# Altium PCB M2_ZED-F9T_MODULE.PcbDoc
Units mil, origin at the board's own origin, x right, y up, seen from the top; angles counter-clockwise.
Board outline 866.14 x 1653.54 mil, 4 copper layers (L01-Top Layer, L02-Inner Layer, L03-Inner Layer, L04-Bottom Layer), stack 29.566 mil thick; 36 components, 30 nets, 248 pads, 183 vias.
Unrouted connection lines stored in the file: 2.
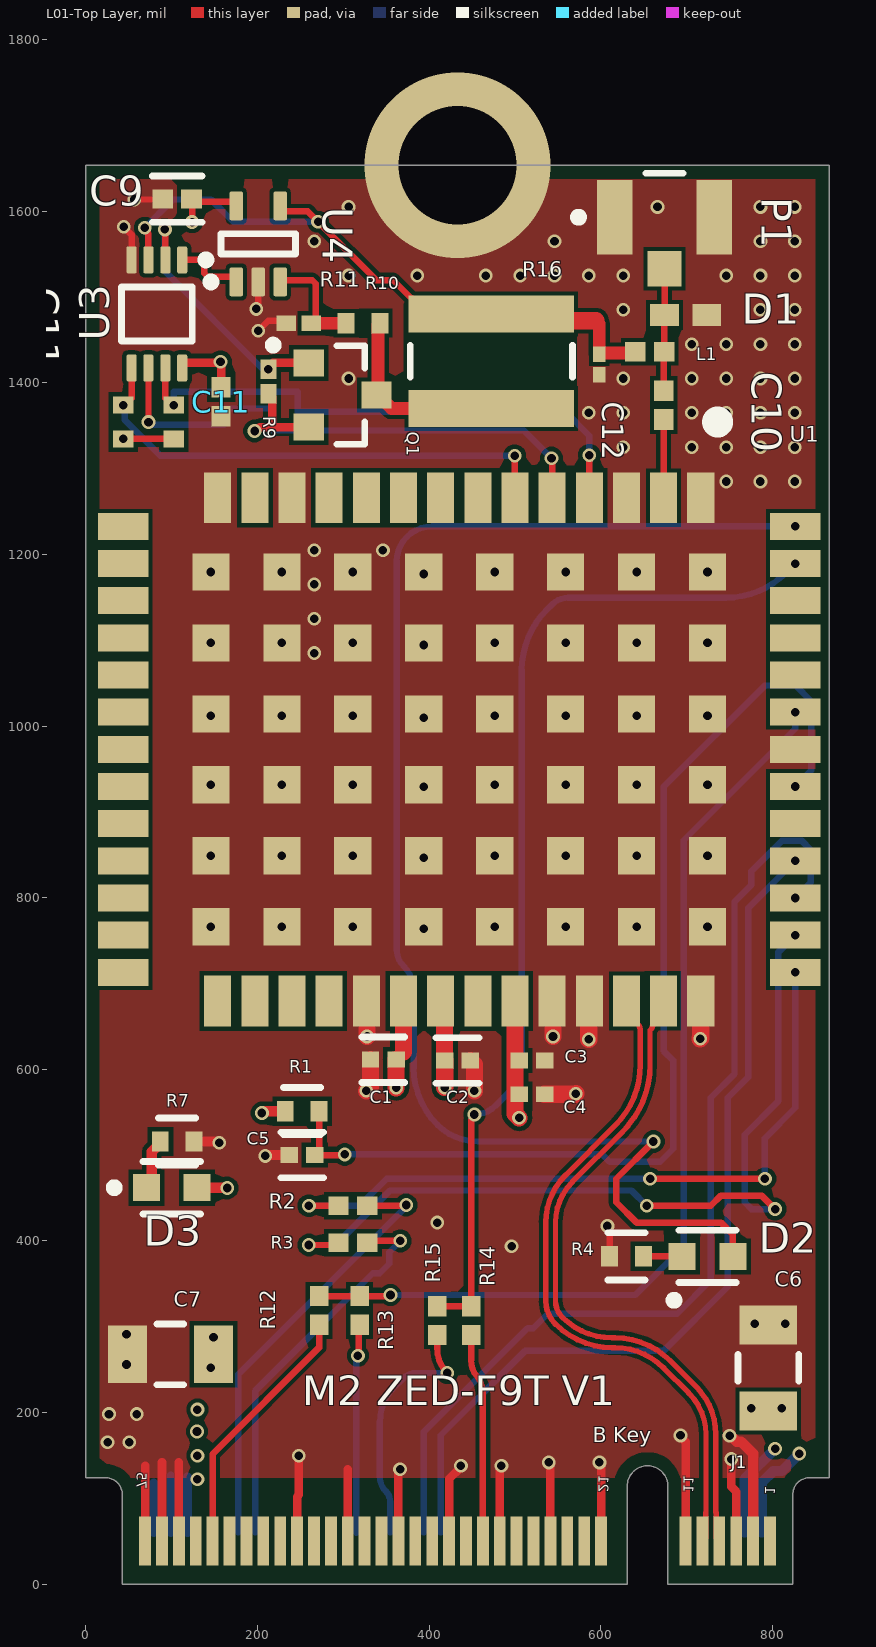
[diagram p0: L01-Top Layer view]
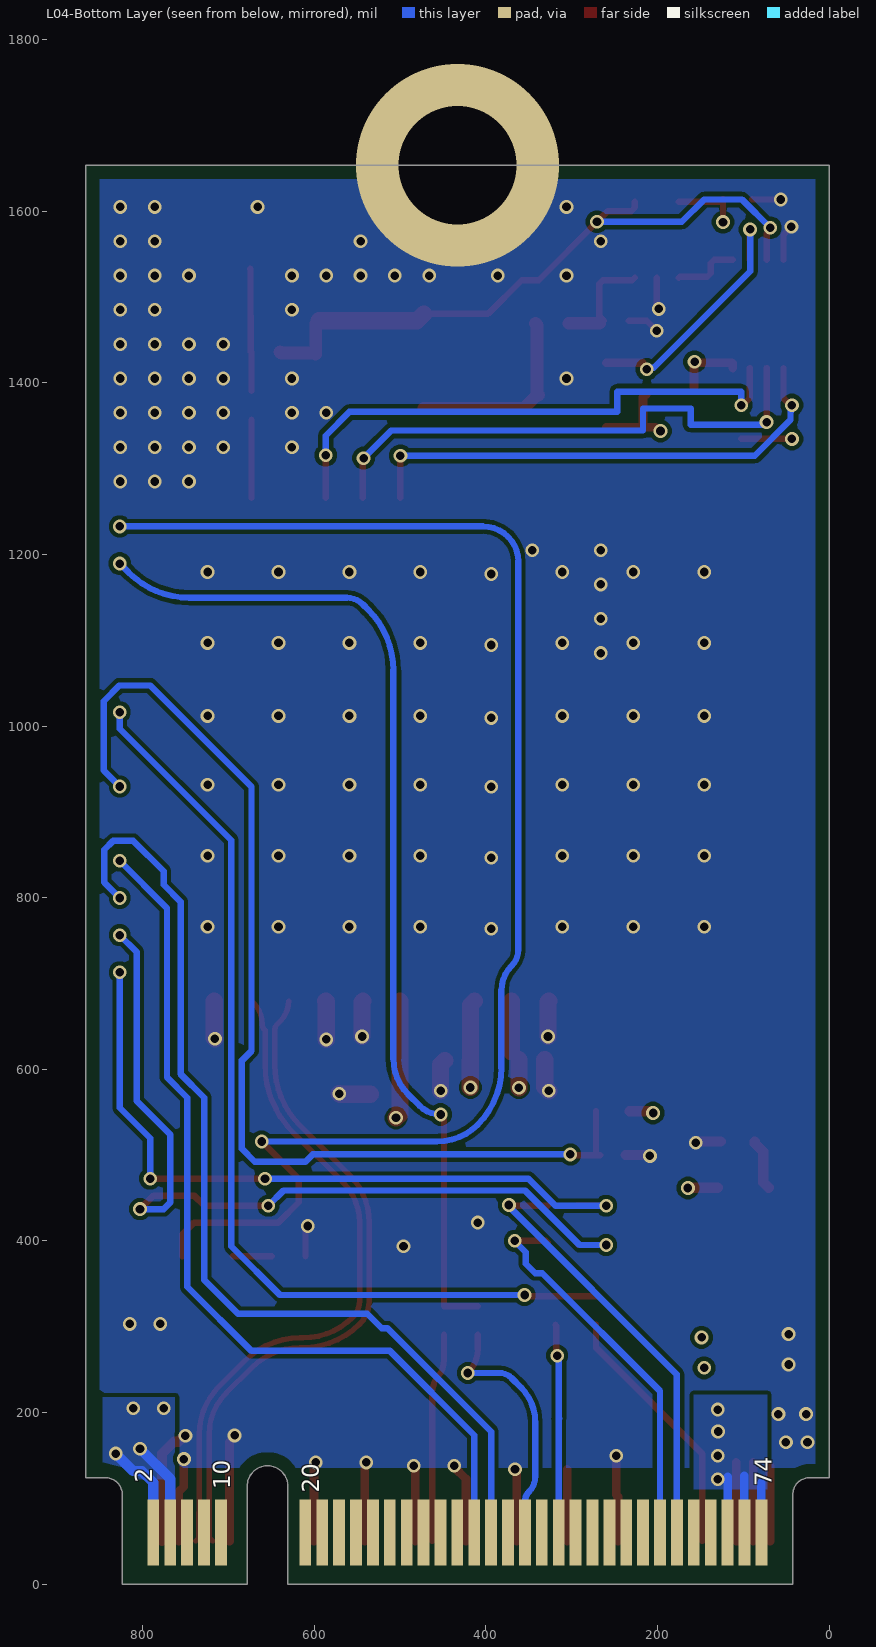
[diagram p1: L04-Bottom Layer view, seen from below]
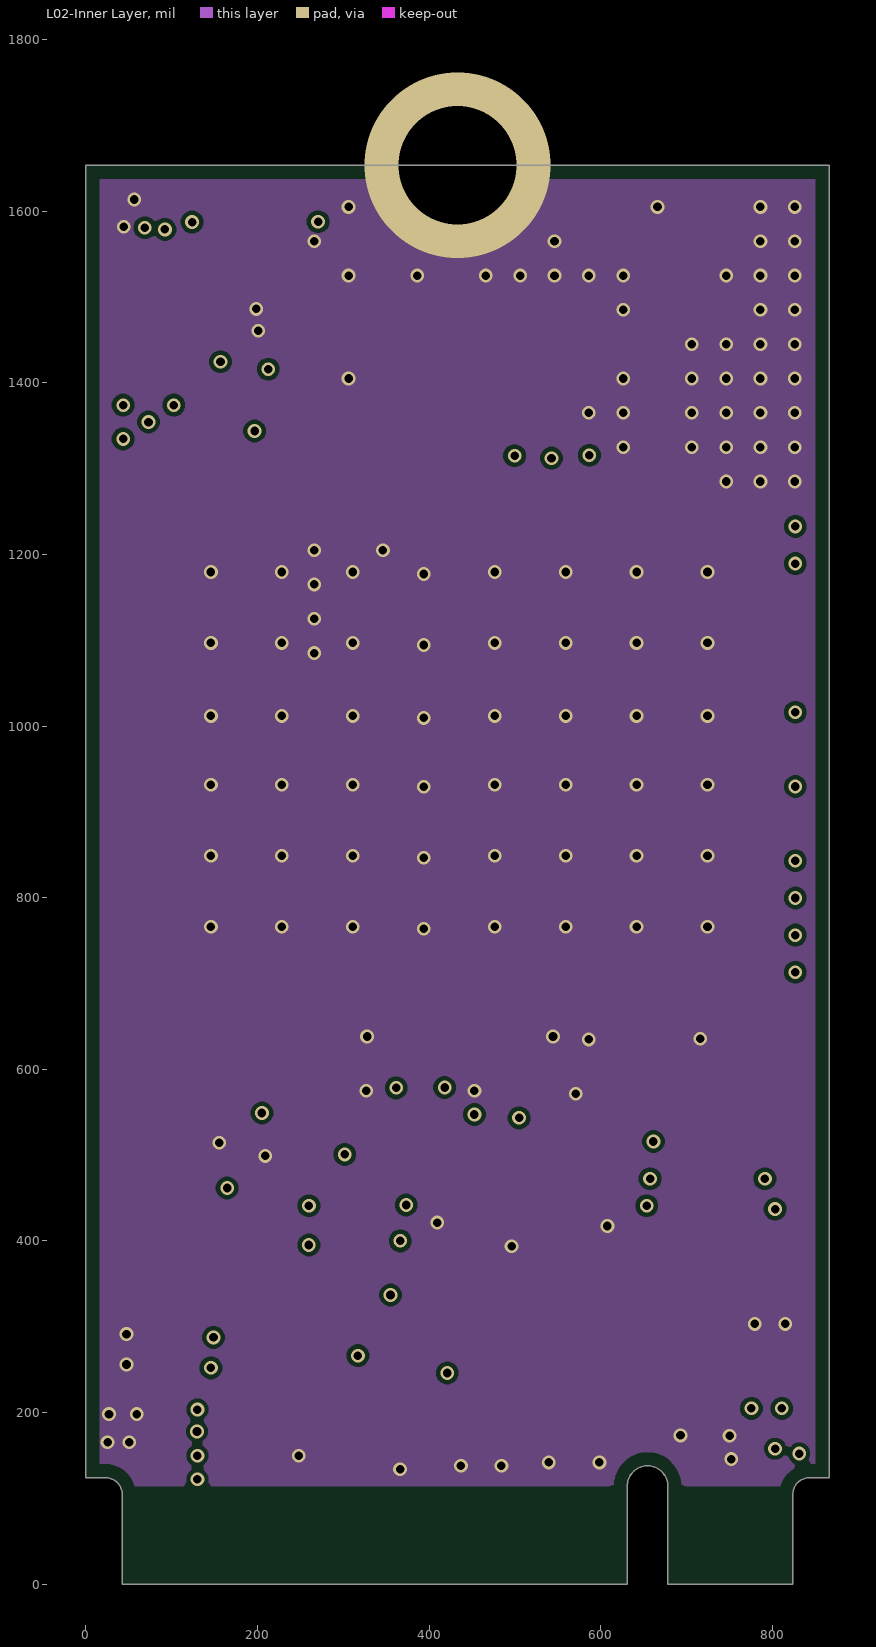
[diagram p2: L02-Inner Layer]
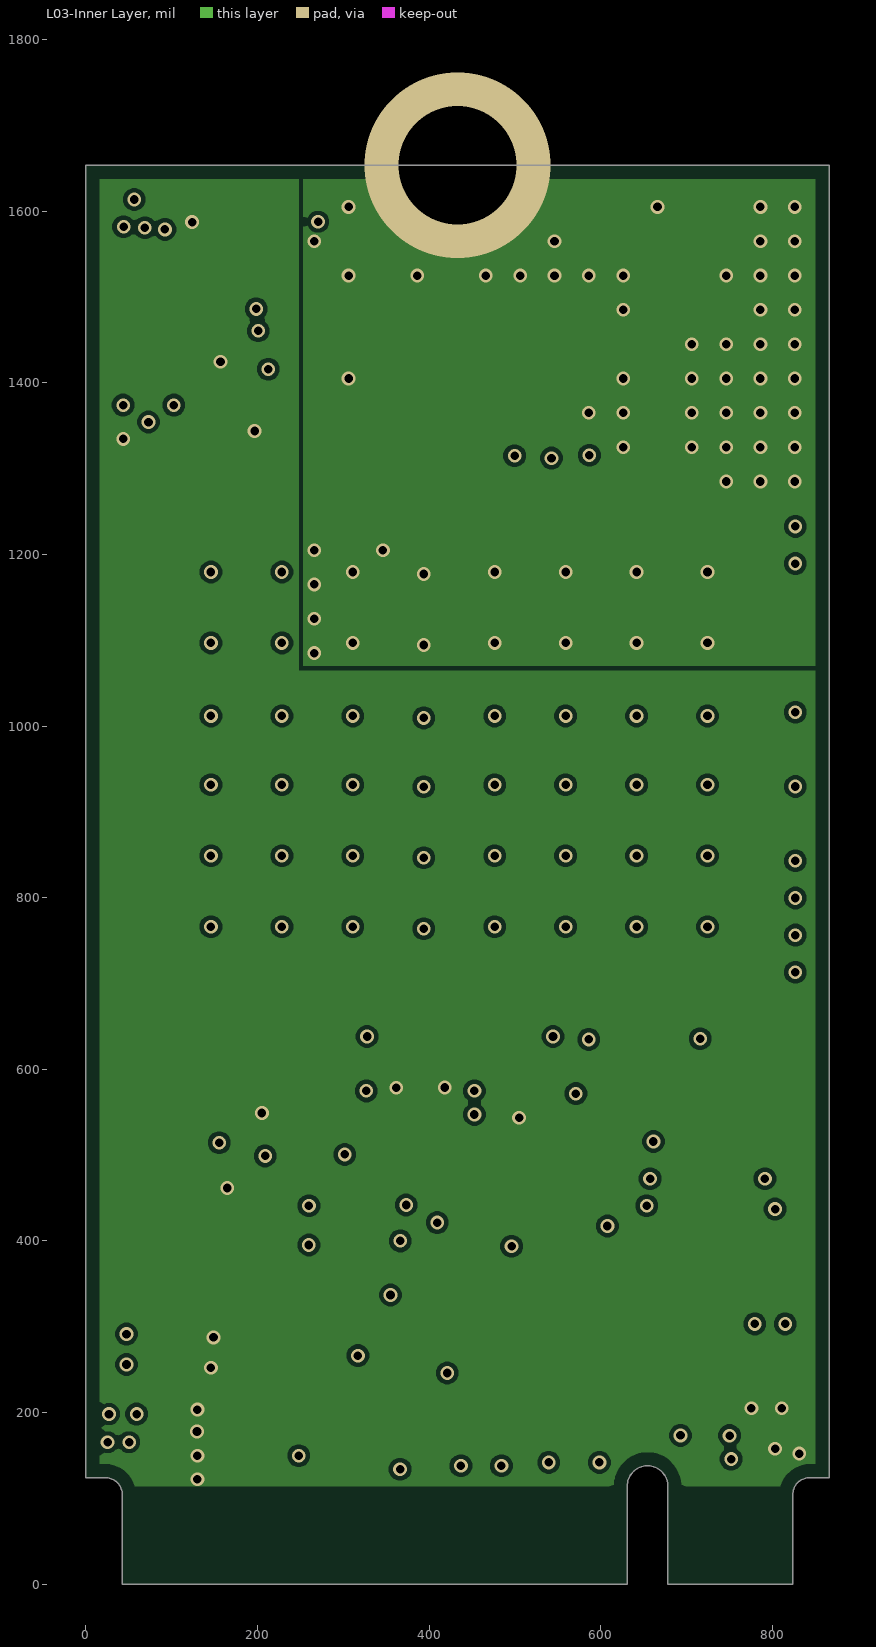
[diagram p3: L03-Inner Layer]
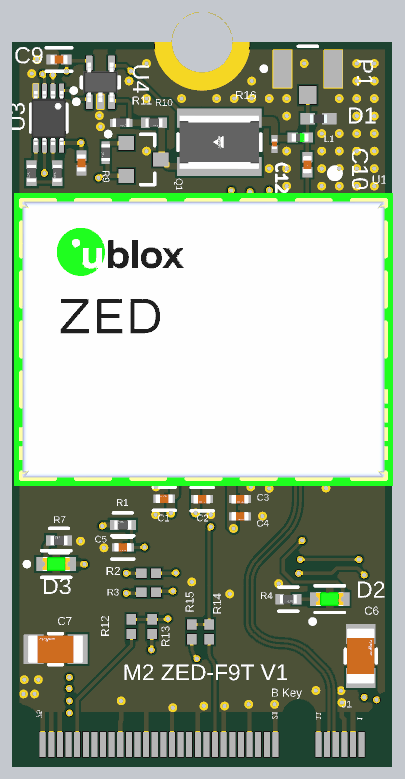
[diagram p4: 3D render of the assembled board from above, using the file's embedded part models]

## Layer stack, top to bottom
Top Solder: solder mask 0.6, Solder Resist, Dk 3.9
L01-Top Layer: signal copper 1.378
Dielectric 1: prepreg 4.331, 2116, Dk 3.7
L02-Inner Layer: signal copper 1.2
Dielectric 2: core 15.748, FR4, Dk 4.04
L03-Inner Layer: signal copper 1.2
Dielectric 3: prepreg 4.331, 2116, Dk 3.7
L04-Bottom Layer: signal copper 1.378
Bottom Solder: solder mask 0.6, Solder Resist, Dk 3.9

## Board outline
42.32,0 42.32,104.33 ccw(c22.64,104.33) 22.64,124.02 0,124.02 0,1653.54 866.14,1653.54 866.14,124.02 843.5,124.02 ccw(c843.5,104.33) 823.82,104.33 823.82,0 678.15,0 678.15,114.17 ccw(c654.53,114.17) 630.91,114.17 630.91,0

## Design rules (kind name [scope] priority, off if disabled: settings)
AcuteAngle [All] p1: minimum=6.00000000000000E+0001 checktracksonly=FALSE
BoardOutlineClearance [All] p1: gap=15.75 ignorepadtopadclearanceinfootprint=FALSE
Clearance Clearance_L1andL4_Copper [(InPolygon AND (OnLayer('Top Layer') OR OnLayer('Bottom Layer'))) vs (InDifferentialPairClass('All Differential Pairs'))] p1: gap=5 ignorepadtopadclearanceinfootprint=FALSE
Clearance [All] p2: gap=5 ignorepadtopadclearanceinfootprint=FALSE
ComponentClearance [All] p1: gap=15.75 collisioncheckmode=3 verticalgap=19.68 showdistances=FALSE
DiffPairsRouting 90_Ohm_L1andL4 [InDifferentialPairClass('USB')] p1: maxlimit=7 minlimit=5 mostfreqgap=7 toplayer_maxgap=5 toplayer_prefgap=5 toplayer_minwidth=6.33 toplayer_maxwidth=6.33 toplayer_prefwidth=6.33 bottomlayer_maxgap=5 bottomlayer_prefgap=5 bottomlayer_minwidth=6.33 bottomlayer_maxwidth=6.33 bottomlayer_prefwidth=6.33 impedanceprofiledriven=TRUE impedanceprofileid={6D9B781E-2234-44CB-9805-C73247B854E7} impedanceprofilevalue=90.000000 maxuncoupledlength=200
DiffPairsRouting 100_Ohm_L1andL4 [InDifferentialPairClass('100_Ohm')] p2: maxlimit=7 minlimit=7 mostfreqgap=7 toplayer_minwidth=8 toplayer_maxwidth=8 toplayer_prefwidth=8 midlayer1_minwidth=8 midlayer1_maxwidth=8 midlayer1_prefwidth=8 midlayer2_minwidth=8 midlayer2_maxwidth=8 midlayer2_prefwidth=8 bottomlayer_minwidth=8 bottomlayer_maxwidth=8 bottomlayer_prefwidth=8 maxuncoupledlength=200
DiffPairsRouting 100_Ohm_Default [All] p3: maxlimit=10 minlimit=9.5 mostfreqgap=10 toplayer_maxgap=9.5 toplayer_prefgap=9.5 toplayer_minwidth=4.5 toplayer_maxwidth=4.5 toplayer_prefwidth=4.5 midlayer1_mingap=10 midlayer1_minwidth=15 midlayer1_maxwidth=15 midlayer1_prefwidth=15 midlayer2_mingap=10 midlayer2_minwidth=15 midlayer2_maxwidth=15 midlayer2_prefwidth=15 bottomlayer_maxgap=9.5 bottomlayer_prefgap=9.5 bottomlayer_minwidth=4.5 bottomlayer_maxwidth=4.5 bottomlayer_prefwidth=4.5 maxuncoupledlength=200
HoleSize [All] p1: absolutevalues=TRUE maxlimit=118.11 minlimit=5.91 maxpercent=80.000 minpercent=20.000
HoleToHoleClearance [All] p1: gap=11.81 allowstackedmicrovias=TRUE
MatchedLengths [InDifferentialPairClass('All Differential Pairs')] p1: tolerance=10 checknetsindiffpair=TRUE checkdiffpairvsdiffpair=FALSE checkxsignals=FALSE checkothers=FALSE
MinimumSolderMaskSliver [All] p1: minsoldermaskwidth=3.94 // 0.076mm for Green Soldermask, 0.1 for other color soldermask
PlaneClearance [All] p1: clearance=10
PolygonConnect [All] p1: connectstyle=Direct reliefconductorwidth=20 reliefentries=4 polygonreliefangle="90 Angle" airgapwidth=10
RoutingCorners [All] p1: cornerstyle=45-Degree minsetback=98.43 maxsetback=98.43
RoutingVias [All] p1: holewidth=10 width=16 viastyle="Through Hole" minholewidth=10 minwidth=16 maxholewidth=11.81 maxwidth=23.62
SilkToSilkClearance [All] p1: silktosilkclearance=3.94
SilkToSolderMaskClearance [IsPad] p1: minsilkscreentomaskgap=5 clearancetoexposedcopper=TRUE
SolderMaskExpansion [All] p1: expansion=1.97 istentingtop=FALSE
UnRoutedNet [All] p1: checkbadconnections=TRUE
Width [All] p1: maxlimit=100 minlimit=5 preferedwidth=7.5 toplayer_maxwidth=40 bottomlayer_maxwidth=40 minimp=50.000000 maximp=50.000000 favimp=50.000000
20 further rules are at their usual default settings.

## Classes and differential pairs
differential pair class USB: USB_D
net class RF: RF_ANT RF_IN
component class 02-Antenna_Supervisor: C9 C10 C11 C12 D1 L1 P1 Q1 R9 R10 R11 R16 R17 R18 U3 U4
component class 03-M2_GoldFingers: C6 C7 J1 R12 R13 R14 R15
component class 01-M2_ZED-F9T_MODULE: C1 C2 C3 C4 C5 D2 D3 R1 R2 R3 R4 R7 U1
differential pair USB_D: +USB_D_P -USB_D_N

## Components (designator, comment, footprint, x,y, rotation, side; value= is the part's Value field where it differs from the comment)
C1 "1uF_25V_0402" FP-CL542-IPC_C 346.55,611.13 r180 top
C2 "1uF_25V_0402" FP-CL542-IPC_C 433.07,610.24 r0 top
C3 "1uF_25V_0402" FP-CL542-IPC_C 519.68,610.24 r0 top
C4 "1uF_25V_0402" FP-CL542-IPC_C 519.68,570.87 r0 top
C5 "1uF_25V_0402" FP-CL542-IPC_C 251.97,500 r0 top
C6 "47uF_6.3V_1206" FP-GRM31C-0_2-e0_3_0_8-IPC_C 795.28,251.97 r90 top
C7 "47uF_6.3V_1206" FP-GRM31C-0_2-e0_3_0_8-IPC_C 98.43,267.72 r180 top
C9 "100nF" FP-0402-L_1_0_0_05-W_0_5-IPC_B 106.3,1614.17 r180 top
C10 "100nF" FP-0402-L_1_0_0_05-W_0_5-IPC_B 673.23,1374.02 r90 top
C11 "100nF" FP-0402-L_1_0_0_05-W_0_5-IPC_B 157.48,1377.95 r270 top
C12 "10nF" FP-GRM033-0_03-IPC_B 598.27,1421.32 r270 top
D1 "PESD0402-140" FP-PESD0402-MFG 699,1478.89 r180 top value=0.25pF
D2 "LTST-C191KGKT" FP-LTST-C191KGKT-MFG 724.41,381.89 r0 top
D3 "LTST-C191KGKT" FP-LTST-C191KGKT-MFG 99.92,461.92 r0 top
J1 "OCPTAP_M2_FINGERS" "OCPTAP M2 FINGERS" 797.24,50.2 r0 top locked
L1 "47nH 300mA" FP-LQG15HH_02-IPC_B 657,1436.14 r0 top
P1 "U.FL-R-SMT-1(01)" HRS-U.FL-R-SMT-3_V 674.42,1593.01 r0 top
Q1 "NTR2101PT1G" ONSC-SOT-23-3-318-08_V 299.21,1385.83 r0 top
R1 "1k" FP-RMCF0402-MFG 251.97,551.18 r180 top
R2 "0_5%_0402" RESC1005X40X25NL05T10 311.02,440.94 r180 top
R3 "0_5%_0402" RESC1005X40X25NL05T10 311.02,397.64 r180 top
R4 "1k" FP-RMCF0402-MFG 629.92,381.89 r0 top
R7 "1k" FP-RMCF0402-MFG 106.3,515.75 r180 top
R9 "100k" FP-RMCF0402-IPC_C 212.6,1401.57 r270 top
R10 "1k" FP-RMCF0402-MFG 322.83,1469.49 r0 top
R11 "100k" FP-RMCF0402-IPC_C 248.03,1469.44 r0 top
R12 "0_5%_0402" RESC1005X40X25NL05T10 271.65,318.9 r270 top
R13 "0_5%_0402" RESC1005X40X25NL05T10 318.9,318.9 r270 top
R14 "DNI_0_5%_0402" RESC1005X40X25NL05T10 448.82,307.09 r90 top
R15 "0_5%_0402" RESC1005X40X25NL05T10 409.45,307.09 r90 top
R16 "22_1%_1218 1.5W" FP-CRCW1218-HPe3-MFG 472.44,1425.2 r270 top
R17 "1k" FP-RMCF0402-MFG 102.36,1354.33 r270 top
R18 "1k" FP-RMCF0402-MFG 43.31,1354.33 r270 top
U1 "ZED-F9T-00B" GPS_ZED-F9T 716.54,1266.14 r180 top locked
U3 "SN74LVC3G07DCUR" DCU0008A_N 82.68,1480.32 r270 top
U4 "LPV511MGX/NOPB" DCK0005A_N 200.79,1561.93 r90 top

## Footprints (in the part's own frame and the unit in brackets; to place one, negate y for a bottom-side part, rotate by r counter-clockwise, add the part's x,y. Pads: shape width x height; smd on the part's side, far side on the other; paste and mask are expansions set on the pad)
DCK0005A_N [mm] "SOT23, 5-Leads, Body 2.15x1.4mm, Pitch 0.65mm, IPC Medium Density"
  rrect25% 0.85x0.4 smd: 1(-1.125,0.65) 2(-1.125,0) 3(-1.125,-0.65) 4(1.125,-0.65) 5(1.125,0.65)
  silkscreen extent -1.25,-1.1 0.3,1.52, body extent -1.14,-1 1.14,1, height 0.94
DCU0008A_N [mm] "SOP, 8-Leads, Body 2.4x2.1mm, Pitch 0.5mm, IPC Medium Density"
  rrect33% 0.8x0.3 smd: 1(-1.6,0.75) 2(-1.6,0.25) 3(-1.6,-0.25) 4(-1.6,-0.75) 5(1.6,-0.75) 6(1.6,-0.25) 7(1.6,0.25) 8(1.6,0.75)
  silkscreen extent -1.72,-1.05 0.8,1.58, body extent -1.56,-1 1.56,1, height 0.9
FP-0402-L_1_0_0_05-W_0_5-IPC_B [mil]
  rect 24.23x22.54 smd paste+0 mask+0: 1(-16.87,0) 2(16.87,0)
  silkscreen extent -29,-27 29,27, body extent -35,-17 35,17, height 10
FP-CL542-IPC_C [mil]
  rect 20.29x18.6 smd paste+0 mask+0: 1(-14.9,0) 2(14.9,0)
  silkscreen extent -25,-27 25,27, body extent -29,-15 29,15, height 10
FP-CRCW1218-HPe3-MFG [mm]
  rect 1.1x4.9 smd paste+0 mask+0: 1(-1.4,0) 2(1.4,0)
  silkscreen extent -0.48,-2.4 0.48,2.4, body extent -2.05,-2.55 2.05,2.55, height 0.25
FP-GRM31C-0_2-e0_3_0_8-IPC_C [mil]
  rect 45.46x67.17 smd paste+0 mask+0: 1(-50.23,0) 2(50.23,0)
  silkscreen extent -16,-35 16,35, body extent -77,-39 77,39, height 10
FP-GRM033-0_03-IPC_B [mil]
  rect 17.88x14.28 smd paste+0 mask+0: 1(-11.98,0) 2(11.98,0)
  body extent -27,-13 27,13, height 10
FP-LQG15HH_02-IPC_B [mil]
  rect 24.23x22.54 smd paste+0 mask+0: 1(-16.87,0) 2(16.87,0)
  body extent -35,-17 35,17, height 10
FP-LTST-C191KGKT-MFG [mm]
  rect 0.8x0.8 smd paste+0 mask+0: 1(-0.75,0) 2(0.75,0)
  silkscreen extent -1.12,-1.42 0.85,0.77, body extent -1.25,-0.55 1.25,0.55, height 0.25
FP-PESD0402-MFG [mm]
  rect 0.85x0.65 smd paste+0 mask+0: 1(-0.625,0) 2(0.625,0)
  body extent -1.15,-0.43 1.15,0.43, height 0.25
FP-RMCF0402-IPC_C [mil]
  rect 22.88x18.6 smd paste+0 mask+0: 1(-14.39,0) 2(14.39,0)
  body extent -30,-15 30,15, height 10
FP-RMCF0402-MFG [mm]
  rect 0.5x0.6 smd paste+0 mask+0: 1(-0.5,0) 2(0.5,0)
  silkscreen extent -0.55,-0.7 0.55,0.7, body extent -0.85,-0.4 0.85,0.4, height 0.25
GPS_ZED-F9T [mm]
  rect 0.8x1.5 smd: 1(0,0) 2(1.1,0) 3(2.2,0) 4(3.3,0) 5(4.4,0) 6(5.5,0) 7(6.6,0) 8(7.7,0) 9(8.8,0) 10(9.9,0) 11(11,0) 12(12.1,0) 13(13.2,0) 14(14.3,0) 28(14.3,14.9) 29(13.2,14.9) 30(12.1,14.9) 31(11,14.9) 32(9.9,14.9) 33(8.8,14.9) 34(7.7,14.9) 35(6.6,14.9) 36(5.5,14.9) 37(4.4,14.9) 38(3.3,14.9) 39(2.2,14.9) 40(1.1,14.9) 41(0,14.9)
  rect 1.5x0.8 smd: 15(17.1,0.85) 16(17.1,1.95) 17(17.1,3.05) 18(17.1,4.15) 19(17.1,5.25) 20(17.1,6.35) 21(17.1,7.45) 22(17.1,8.55) 23(17.1,9.65) 24(17.1,10.75) 25(17.1,11.85) 26(17.1,12.95) 27(17.1,14.05) 42(-2.8,14.05) 43(-2.8,12.95) 44(-2.8,11.85) 45(-2.8,10.75) 46(-2.8,9.65) 47(-2.8,8.55) 48(-2.8,7.45) 49(-2.8,6.35) 50(-2.8,5.25) 51(-2.8,4.15) 52(-2.8,3.05) 53(-2.8,1.95) 54(-2.8,0.85)
  rect 1.1x1.1 smd: 55(-0.2,12.7) 55(-0.2,10.6) 55(-0.2,8.5) 55(-0.2,6.4) 55(-0.2,4.3) 55(-0.2,2.2) 55(1.9,10.6) 55(1.9,12.7) 55(1.9,8.5) 55(1.9,6.4) 55(1.9,2.2) 55(1.9,4.3) 55(4,10.6) 55(4,12.7) 55(4,4.3) 55(4,6.4) 55(4,8.5) 55(4,2.2) 55(6.1,10.6) 55(6.1,12.7) 55(6.1,4.3) 55(6.1,6.4) 55(6.1,8.5) 55(6.1,2.2) 55(8.2,6.4) 55(8.2,8.5) 55(8.2,10.6) 55(8.2,12.7) 55(8.2,2.2) 55(8.2,4.3) 55(10.3,6.4) 55(10.3,8.5) 55(10.3,10.6) 55(10.3,12.7) 55(10.3,2.2) 55(10.3,4.3) 55(12.4,6.4) 55(12.4,8.5) 55(12.4,10.6) 55(12.4,12.7) 55(12.4,2.2) 55(12.4,4.3) 55(14.5,12.7) 55(14.5,2.2) 55(14.5,4.3) 55(14.5,6.4) 55(14.5,8.5) 55(14.5,10.6)
  silkscreen extent -0.58,-2.32 -0.42,-2.16, body extent -3.88,-1.1 18.12,15.9, height 2.49
HRS-U.FL-R-SMT-3_V [mm] "SMT, 3-Leads, Body 2.6x2.6mm"
  rect 1.05x2.2 smd: 1(-1.475,0) 2(1.475,0)
  rect 1x1.05 smd: 3(0,-1.525)
  silkscreen extent -2.67,-0.12 0.55,1.3, body extent -1.3,-1.3 1.3,1.3, height 1.25
"OCPTAP M2 FINGERS" [mm]
  rect 0.35x1.45 smd: 1(0,0) 3(-0.5,0) 5(-1,0) 7(-1.5,0) 9(-2,0) 11(-2.5,0) 21(-5,0) 23(-5.5,0) 25(-6,0) 27(-6.5,0) 29(-7,0) 31(-7.5,0) 33(-8,0) 35(-8.5,0) 37(-9,0) 39(-9.5,0) 41(-10,0) 43(-10.5,0) 45(-11,0) 47(-11.5,0) 49(-12,0) 51(-12.5,0) 53(-13,0) 55(-13.5,0) 57(-14,0) 59(-14.5,0) 61(-15,0) 63(-15.5,0) 65(-16,0) 67(-16.5,0) 69(-17,0) 71(-17.5,0) 73(-18,0) 75(-18.5,0)
  rect 0.35x1.95 smd far side: 2(-0.244,0.25) 4(-0.744,0.25) 6(-1.244,0.25) 8(-1.744,0.25) 10(-2.244,0.25) 20(-4.744,0.25) 22(-5.244,0.25) 24(-5.744,0.25) 26(-6.244,0.25) 28(-6.744,0.25) 30(-7.244,0.25) 32(-7.744,0.25) 34(-8.244,0.25) 36(-8.744,0.25) 38(-9.244,0.25) 40(-9.744,0.25) 42(-10.244,0.25) 44(-10.744,0.25) 46(-11.244,0.25) 48(-11.744,0.25) 50(-12.244,0.25) 52(-12.744,0.25) 54(-13.244,0.25) 56(-13.744,0.25) 58(-14.244,0.25) 60(-14.744,0.25) 62(-15.244,0.25) 64(-15.744,0.25) 66(-16.244,0.25) 68(-16.744,0.25) 70(-17.244,0.25) 72(-17.744,0.25) 74(-18.244,0.25)
ONSC-SOT-23-3-318-08_V [mm] "SOT23, 3-Leads, Body 2.92x1.3mm, Pitch 0.95mm"
  rect 0.9x0.8 smd: 1(-1,0.95) 2(-1,-0.95) 3(1,0)
  silkscreen extent -2.18,-1.46 0.65,1.6, body extent -0.65,-1.46 0.65,1.46, height 1.11
RESC1005X40X25NL05T10 [mm] "Chip Resistor, 2-Leads, Body 1.00x0.50mm, IPC Medium Density"
  rect 0.6x0.55 smd: 1(-0.425,0) 2(0.425,0)
  body extent -0.53,-0.27 0.53,0.28, height 0.4

## Part data
C1 C2 C3 C4 C5: library part CMP-13271-001051-1, "Cap Ceramic 1uF 25V X5R ±10% SMD 0402 +85°C Paper T/R", Capacitance=1uF, Case Code (Imperial)=0402, Case Code (Metric)=1005, Dielectric=X5R, Max Operating Temperature=85°C, Min Operating Temperature=-55°C, Package Quantity=10000, Tolerance=10%, Voltage Rating=25V, Case/Package=0402, Depth=0.5mm, Height=0.5mm, Lead Free="Lead Free", Length=1mm, Material=Ceramic, Mount="Surface Mount", Packaging="Tape and Reel", Radiation Hardening=No, Thickness=0.022inch, Width=0.02inch
C6 C7: library part CMP-2000-06344-2, "Chip Multilayer Ceramic Capacitors for General Purpose, 1206, 47uF, X5R, 15%, 20%, 6.3V", Capacitance=47uF, Case Code (Imperial)=1206, Case Code (Metric)=3216, Dielectric=X5R, Max Operating Temperature=85°C, Min Operating Temperature=-55°C, Package Quantity=2000, Tolerance=20%, Voltage=6.3V, Case/Package=1206, Depth=1.6mm, Height=1.6mm, Lead Free="Lead Free", Length=3.2mm, Material=Ceramic, Mount="Surface Mount", Packaging="Tape and Reel", Radiation Hardening=No, REACH SVHC="No SVHC", Termination=SMD/SMT, Thickness=0.071inch, Voltage Rating=6.3V, Voltage Rating (DC)=6.3V, Width=0.063inch
C9 C10 C11: library part CMP-14477-000330-2, "None", Case Code (Imperial)=0402, Case Code (Metric)=1005, Dielectric=X5R, Max Operating Temperature=85°C, Min Operating Temperature=-55°C, Package Quantity=10000, Tolerance=10%, Voltage Rating=50V, Capacitance=100nF, Case/Package=0402, Halogen Free="Halogen Free", Height=0.5mm, Length=0.039inch, Mount="Surface Mount", Packaging="Tape and Reel", RoHS Compliant=Yes, Termination=SMD/SMT, Thickness=0.022inch, Voltage Rating (DC)=50V, Width=0.02inch
C12: library part CMP-06035-000448-1, "Chip Multilayer Ceramic Capacitors for General Purpose, 0201, 10000pF, X7R, 15%, 10%, 16V", Dielectric=X7R, Tolerance=10%, Voltage Rating (DC)=16V, Capacitance=10nF, Length=600um, Thickness=300um, Width=300um
D1: library part CMP-08607-000011-1, "TVS DIODE 14V 40V 0402", Breakdown Voltage=14V, Capacitance=0.25pF, Clamping Voltage=40V, Manufacturer="Littelfuse Inc.", Package=PESD0402, Temperature="-55°C to +125°C", Temperature Range High=+125°C, Temperature Range Low=-55°C, Automotive=Yes, Automotive Grade="Grade 1", CATEGORY=Diode, ComponentLink2Description=Datasheet, ComponentLink2URL=https://www.littelfuse.com/~/media/electronics/datasheets/polymer_esd_suppressors/littelfuse_polymer_esd_suppressor_pesd_catalog_datasheet.pdf.pdf, Device Class L1="Circuit Protection", Device Class L2="TVS Diodes", Device Class L3=unset, Digikey Description="TVS DIODE 14V 40V 0402", Direction=Bidirectional, Height=0.43mm, Ipc Land Pattern Name=DIOC10050X33, Lead Free=Yes, Manufacturer Part Number=PESD0402-140, Number Of Channels=1, Octopart=https://octopart.com/pesd0402-140-littelfuse-74215061, Reverse Standoff Voltage=14V, RoHS=TRUE
D2 D3: library part CMP-2000-05198-2, "LED GREEN CLEAR SMD", Case Code (Imperial)=0603, Case Code (Metric)=1608, Color=Green, Forward Current=30mA, Forward Voltage=2V, Lens Color=Colorless, Max Operating Temperature=85°C, Max Power Dissipation=75mW, Min Operating Temperature=-55°C, Package Quantity=1, Reverse Voltage=5V, Test Current=20mA, Case/Package=0603, Depth=0.8mm, Dominant Wavelength=571nm, Height=0.55mm, Illumination Color=Green, Lead Free="Lead Free", Length=1.6mm, Lens Style=Rectangular, Lens Transparency=Clear, Luminous Intensity=35mcd, Mount="Surface Mount", Number of Elements=1, Number of LEDs=1, Number of Pins=2, Packaging="Tape and Reel", Power Dissipation=75mW, Power Rating=75mW, Radiation Hardening=No, Viewing Angle=130°, Wavelength=574nm, Width=0.8mm
L1: library part CMP-06042-015783-1, "Multilayer type RF Inductor 47nH ±5% 0.72Ω 300mA 0402", Case Code (Imperial)=0402, Case Code (Metric)=1005, Current Rating=200mA, DC Resistance (DCR)=720mR, Inductance=47nH, Max Operating Temperature=125°C, Min Operating Temperature=-55°C, Package Quantity=1, Self Resonant Frequency=1GHz, Test Frequency=100MHz, Tolerance=5%, Case/Package=0402, Core Material=Air, DC Current=200mA, Depth=0.55mm, Height=0.5mm, Height - Seated (Max)=0.022inch, Lead Free="Lead Free", Length=1mm, Max DC Current=200mA, Military Standard=Not, Mount="Surface Mount", Packaging="Tape and Reel", Q Factor=8, Radiation Hardening=No, Rated Current-Max=200mA, Series=LQG15HS, Shielding=Unshielded, Termination=SMD/SMT, Width=0.02inch
P1: library part CMP-2000-05153-1, "Ultra Small Coaxial Connector, 6 GHz, -40 to 90 degC, 3-Pin SMD, RoHS, Bulk", Dielectric Material=LiquidCrystalPolymer(LCP), Frequency - Max=6GHz, Housing Color=Silver, Manufacturer="Hirose Electric", Operating Temperature=-40degC~90degC, Package Description="3-Pin Surface Mount Device, Body 2.6 x 2.6 mm", Package Reference=U.FL-R-SMT, Standard Package=100, Body Finish=Silver, Body Material=PhosphorBronze, CATEGORY=Connectors,Interconnects, Center Contact Material=PhosphorBronze, Center Contact Plating=Gold, Connector Style=U.FL, Connector Type=Jack,MalePin, Contact Termination=Solder, Datasheet URL=https://datasheet.ciiva.com/26945/getdatasheetpartid-475239-26945414.pdf, Datasheet Version=Feb-09, Dynamic Catalog=U.FLSeries, Family=CoaxialConnectors(RF), Fastening Type=Snap-On, Featured Product=HiroseU.FLSeries, Impedance=50Ohm, Manufacturer URL=https://www.hirose.com, Minimum Quantity=UltraMiniatureCoaxial, Mounting Type=SurfaceMount, Online Catalog=U.FLSeries, Other Names="H122041 / U.FL-R-SMT-1(01)-ND", Packaging=Bulk, Quantity Available=Bulk, Series=U.FL, Shield Termination=Solder, Unit PriceUSD=U.FL
Q1: library part CMP-1058-00758-1, "Small Signal MOSFET, -8 V, -3.7 A, Single P-Channel, 3-Pin SOT-23, Pb-Free, Tape and Reel", Manufacturer="On Semiconductor", Package Type=SOT-23-3, Channel Polarity="P Channel", Ciss Typ (pF)=1173, ComponentLink1Description="Manufacturer URL", ComponentLink1URL=http://www.onsemi.com/, ComponentLink2Description=Datasheet, ComponentLink2URL=http://www.onsemi.cn/pub_link/Collateral/NTR2101P-D.PDF, ComponentLink3Description="Package Specification", ComponentLink3URL=http://www.onsemi.cn/pub_link/Collateral/318-08.PDF, Configuration=Single, Coss Typ (pF)=289, Crss Typ (pF)=218, DatasheetVersion="Rev. 6", ID Max (A)=3.7, Mounting Technology="Surface Mount", PackageDescription="3-Pin Small Outline Transistor, Body 2.92 x 1.3 mm, Pitch 0.95 mm", PackageReference=SOT-23-3-318-08, PackageVersion="Rev. AP, 11/2009", Packing="Tape and Reel", PartNumber=NTR2101PT1G, PD Max (W)=0.96, RoHS=Pb-Free, V(BR)DSS Min (V)=8, VGS Max (V)=8, VGS(th) Max (V)=1
R1 R4 R7 R10 R17 R18: library part CMP-26527-000026-1, "1kΩ ±1% 0.063W 0402 Thick Film Chip Resistor AEC-Q200 compliant", Case Code (Imperial)=0402, Case Code (Metric)=1005, Max Operating Temperature=155°C, Max Power Dissipation=63mW, Min Operating Temperature=-55°C, Resistance=1kR, Resistor Type="Thick Film", Temperature Coefficient=100ppm/°C, Tolerance=1%, Case/Package=0402, Construction=Rectangular, Contact Plating=Tin, Depth=0.5mm, Features="Automotive AEC-Q200", Height=0.016inch, Lead Free="Lead Free", Length=1mm, Military Standard=Not, Mount="Surface Mount", Number of Terminations=2, Packaging="Tape and Reel", Power Rating=63mW, Radiation Hardening=No, RoHS Compliant=Yes, Series=RMCF, Size Code=0402, Width=0.02inch
R2 R3 R12 R13 R14 R15: library part CMP-2002-06457-1, Manufacturer=Panasonic, Part Number=ERJ-U020R00X
R9 R11: library part CMP-2000-06984-2, "100kΩ ±1% 0.063W 0402 Thick Film Chip Resistor AEC-Q200 compliant", Case Code (Imperial)=0402, Case Code (Metric)=1005, Max Operating Temperature=155°C, Max Power Dissipation=63mW, Min Operating Temperature=-55°C, Power Rating=62.5mW, Resistance=100kR, Resistor Type="Thick Film", Temperature Coefficient=100ppm/°C, Tolerance=1%, Case/Package=0402, Construction=Rectangular, Contact Plating=Tin, Depth=0.5mm, Features="Automotive AEC-Q200", Height=0.016inch, Lead Free="Lead Free", Length=1mm, Military Standard=Not, Mount="Surface Mount", Number of Terminations=2, Packaging="Tape and Reel", Radiation Hardening=No, RoHS Compliant=Yes, Series=RMCF, Size Code=0402, Width=0.02inch
R16: library part CMP-02407-011337-1, "RES Thick Film, 22.6Ω, 1%, 1.5W, 100ppm/°C, 1218", Case/Package=1218, Max Operating Temperature=155°C, Max Power Dissipation=1.5W, Min Operating Temperature=-55°C, Package Quantity=4000, Resistance=22.6R, Resistor Type="Thick Film", Temperature Coefficient=100ppm/°C, Tolerance=1%, Features="Automotive AEC-Q200", Height=0.028inch, Lead Free="Lead Free", Length=0.122inch, Number of Terminations=2, Packaging="Tape and Reel", RoHS Compliant=Yes, Width=0.181inch
U1: library part GPS_ZED-F9T, "Multi-band GNSS Receiver with Nanosecond-level Timing Accuracy", Case/Package=SMD/SMT, Manufacturer=u-blox, Max Operating Temperature=85°C, Min Operating Temperature=-40°C, Supplier Part Number 1=672-1197-1-ND, CATEGORY="RF Receivers, Transceivers", ComponentLink1Description=https://www.u-blox.com/sites/default/files/ZED-F9T_ProductSummary_%28UBX-18011626%29.pdf?src-supplier=Digi-Key, ComponentLink1URL=https://www.u-blox.com/sites/default/files/ZED-F9T_ProductSummary_%28UBX-18011626%29.pdf?src-supplier=Digi-Key, Interface=I2C,SPI,USB,UART, Manufacturer Part Number=ZED-F9T-00B, Packaging="Tape and Reel", Pricing 1="1=199.00000, 10=198.80000, 50=180.89020 (USD)", RoHS=Yes, Sensitivity=-166dBm, Stock 1=826, Supplier 1=Digi-Key
U3: library part CMP-0859-00615-3, "Triple Buffer/Driver With Open-Drain Output, DCU0008A, LARGE T&R", F @ Nom Voltage(Max)(Mhz)=150, Generic Part Number=SN74LVC3G07, ICC @ Nom Voltage(Max)(mA)=0.01, Manufacturer="Texas Instruments", Operating Temperature Range(C)="-40 to 125,-40 to 85", Rating=Catalog, tpd @ Nom Voltage(Max)(ns)=8.3,4.8,4.2,3.4, Voltage(Nom)(V)=1.8,2.5,3.3,5, 3-State Output=No, Bits(#)=3, DatasheetVersion=SCES365K, Input Type=CMOS/TTL, Logic=True, Output Drive (IOL/IOH)(Max)(mA)=32/-32, Output Type=CMOS, PackageReference=DCU0008A, Schmitt Trigger=No, Sub-Family="Non-Inverting Buffer/Driver", Technology Family=LVC, VCC(Max)(V)=5.5, VCC(Min)(V)=1.65
U4: library part CMP-0055-01065-3, "micropower Rail-to-Rail Input and Output Operational Amplifier, 5-pin SC-70, Pb-Free", Manufacturer="Texas Instruments", Package Reference=DCK0005A, PackageTopMarking=A91*XTT, PowerWise=Y, Code_IPC=SOT353-5, Code_JEDEC=MO-203-AA, Code_JEITA=SC-88A, ComponentLink1Description="Datasheet URL", ComponentLink1URL=http://www.ti.com/general/docs/lit/getliterature.tsp?genericPartNumber=LPV511&fileType=pdf, CompType=Amplifiers, PackageDescription="Molded SC-70, 2 x 1.25 x .9mm, 5 Lead, 0.65mm Pitch", PinCount=5, RoHS=Y

## Via types
v1: diameter 16, hole 10, L01-Top Layer to L04-Bottom Layer, 182 vias
v2: diameter 216.54/216.54/216.54/236.22 (per signal layer), hole 137.8, L01-Top Layer to L04-Bottom Layer, 1 vias

## Nets (pads, with @x,y where several pads share a name; then routed paths per layer and width w, separated by ;. In a path a pad name is that pad's centre, name@x,y a point inside that pad or via, vN(x,y) a via of type N, cw(c..) or ccw(c..) an arc to the next point about the centre after c; other vN are vias at no path point)
+3V3: C1.1 C2.1 C3.1 C4.1 C6.1 C7.1 C9.1 C11.1 D3.2 J1.2 J1.4 J1.70 J1.72 J1.74 Q1.2 R1.2 R9.2 R17.2 R18.2 U1.33 U1.34 U1.36 U3.8 U4.5 | length 1140.5
  L01-Top Layer w7.5: v1(43.31,1334.65) R17.2 ; C9.1 C9.1@123.68,1613.67 ; v1(123.68,1587.34) C9.1@123.68,1613.67 ; U4.5@175.2,1611.22 126.12,1611.22 C9.1@123.68,1613.67
  L01-Top Layer w10: U3.8 112.2,1422.57 113.11,1423.48 155.64,1423.48 v1(156.79,1424.63) 157.48,1423.93 C11.1 ; v1(196.52,1343.9) 198.14,1343.9 202.66,1348.43 216.9,1348.43 ; R9.2 216.9,1382.88 216.9,1348.43 ; Q1.2 216.9,1348.43
  L01-Top Layer w12: D3.2 164.54,461.92 v1(164.54,461.58) ; v1(205.13,548.98) 205.13,551.18 R1.2
  L01-Top Layer w20: C1.1 361.54,611.04 v1(361.54,578.28) ; C1.1@370.08,620.31 U1.33 ; U1.34 418.02,674.89 418.02,610.38 C2.1 418.17,578.88 v1(418.02,578.74) ; U1.36 500,548.09 v1(504.78,543.31)
  L04-Bottom Layer w10: J1.74 78.98,118.11 ; J1.72 98.66,126.09 ; J1.70 118.35,125.2
  L04-Bottom Layer w12: J1.4 767.95,122.49 v1(803.15,157.69) ; J1.2 787.64,118.35 800.98,131.69 810.97,131.69 v1(831.32,152.05)
  other v1: 129.92,122.05 129.92,149.61 129.45,177.82 129.92,203.33 775.59,204.72 811.02,204.72 145.67,251.97 148.65,287.4
ANT_DET: R17.1 U1.4 U3.7 | length 656.1
  L01-Top Layer w7.5: U3.7 92.52,1381.89 100.39,1374.02 v1(102.36,1374.02) ; U1.4 586.61,1315.56 v1(586.71,1315.65)
  L04-Bottom Layer w7.5: v1(102.36,1374.02) 102.36,1389.76 247.01,1389.76 247.01,1366.14 559.06,1366.14 586.71,1338.49 v1(586.71,1315.65)
ANT_OFF: U1.5 U3.6 | length 639.9
  L01-Top Layer w7.5: U3.6 72.87,1417.29 v1(72.91,1354.31) v1(72.91,1354.31) ; v1(542.61,1312.26) 543.31,1311.56 U1.5
  L04-Bottom Layer w7.5: v1(72.91,1354.31) 72.91,1351.27 161.42,1351.27 161.42,1370.08 216.9,1370.08 216.9,1344.49 510.38,1344.49 v1(542.61,1312.26)
ANT_SHORT_N: R18.1 U1.6 U3.5 | length 587.4
  L01-Top Layer w7.5: v1(43.31,1374.02) 45.28,1374.02 53.15,1381.89 U3.5 ; v1(499.64,1315.08) 500,1314.73 U1.6
  L04-Bottom Layer w7.5: v1(43.31,1374.02) 44.93,1372.39 44.93,1366.38 45.03,1366.28 45.03,1356.84 86.79,1315.08 v1(499.64,1315.08)
GND: C1.2 C2.2 C3.2 C4.2 C5.1 C6.2 C7.2 C9.2 C11.2 C12.2 D1.1 J1.3 J1.5 J1.11 J1.21 J1.27 J1.33 J1.39 J1.45 J1.51 J1.57 J1.71 J1.73 J1.75 P1.1 P1.2 R4.1 R7.1 R11.1 U1.1 U1.3 U1.12 U1.14 U1.32 U1.37 U1.38 U1.41 U1.48 U1.55 U3.4 U4.2 | length 1802.7
  L01-Top Layer w7.5: v1(43.9,1582) 53.15,1572.76 U3.4 ; v1(56.26,1613.69) 88.95,1613.69 C9.2 ; v1(198.41,1486.12) 200.79,1488.5 U4.2@200.79,1522.64 ; v1(200.79,1460.63) 212.6,1472.44 R11.1@233.64,1472.44 ; v1(607.77,417.31) 610.24,417.31 R4.1
  L01-Top Layer w10: J1.75 68.9,137.8 ; J1.73 88.58,141.73 ; J1.71@106.3,50.2 J1.71 108.27,141.73 ; J1.57 246.06,101.92 248.03,103.89 v1(248.03,149.61) ; J1.51 305.12,133.86 ; J1.45 364.17,131.89 v1(366.14,133.86) ; J1.39 423.23,122.39 437.01,136.17 v1(437.01,137.8) ; J1.33 482.28,135.83 v1(484.25,137.8) ; v1(539.37,141.73) 541.34,139.76 J1.27 ; v1(598.43,141.73) 600.39,139.76 J1.21 ; v1(692.91,173.23) 692.91,171.6 698.82,165.7 J1.11 ; v1(751.97,145.67) 751.97,113.7 757.87,107.79 J1.5
  L01-Top Layer w12: R7.1 155.32,515.75 v1(155.32,514.37) ; v1(208.86,498.93) 208.86,500 C5.1 ; v1(750.18,172.97) 751.26,172.97 758.36,165.87 763.53,165.87 777.56,151.85 J1.3
  L01-Top Layer w20: v1(326.77,574.8) 331.5,579.53 331.5,610.98 C1.2 ; U1.32 327.67,678.63 v1(327.67,638.2) ; C2.2 452.76,605.46 v1(452.76,574.8) ; C4.2 570.26,570.87 v1(570.97,571.57) ; U1.37 544.34,678.5 v1(544.34,638.2) ; v1(586.02,634.73) 586.02,678.94 U1.38 ; v1(715.85,635.6) 716.54,636.28 U1.41
  other v1: 25.18,165.24 50.36,165.35 26.87,198.08 59.06,198.08 47.24,255.91 47.24,291.34 779.53,303.15 814.96,303.15 496.06,393.7 409.45,421.26 393.7,763.78 145.67,766.14 228.35,766.14 311.02,766.14 476.38,766.14 559.06,766.14 641.73,766.14 724.41,766.14 393.7,846.46 145.67,848.82 228.35,848.82 311.02,848.82 476.38,848.82 559.06,848.82 641.73,848.82 724.41,848.82 393.7,929.13 145.67,931.5 228.35,931.5 311.02,931.5 476.38,931.5 559.06,931.5 641.73,931.5 724.41,931.5 393.7,1009.45 145.67,1011.81 228.35,1011.81 311.02,1011.81 476.38,1011.81 559.06,1011.81 641.73,1011.81 724.41,1011.81 266.1,1085.04 393.7,1094.49 145.67,1096.85 228.35,1096.85 311.02,1096.85 476.38,1096.85 559.06,1096.85 641.73,1096.85 724.41,1096.85 266.1,1125.04 266.1,1165.04 393.7,1177.17 145.67,1179.53 228.35,1179.53 311.02,1179.53 476.38,1179.53 559.06,1179.53 641.73,1179.53 724.41,1179.53 266.1,1205.04 346.1,1205.04 746.1,1285.04 786.1,1285.04 826.1,1285.04 626.1,1325.04 706.1,1325.04 746.1,1325.04 786.1,1325.04 826.1,1325.04 586.1,1365.04 626.1,1365.04 706.1,1365.04 746.1,1365.04 786.1,1365.04 826.1,1365.04 306.1,1405.04 626.1,1405.04 706.1,1405.04 746.1,1405.04 786.1,1405.04 826.1,1405.04 706.1,1445.04 746.1,1445.04 786.1,1445.04 826.1,1445.04 626.1,1485.04 786.1,1485.04 826.1,1485.04 306.1,1525.04 386.1,1525.04 466.1,1525.04 506.1,1525.04 546.1,1525.04 586.1,1525.04 626.1,1525.04 746.1,1525.04 786.1,1525.04 826.1,1525.04 266.1,1565.04 546.1,1565.04 786.1,1565.04 826.1,1565.04 306.1,1605.04 666.1,1605.04 786.1,1605.04 826.1,1605.04
  other v2: 433.07,1653.54
NetC5_2: C5.2 R1.1 U1.47 | length 1241.6
  L01-Top Layer w7.5: C5.2 C5.2@271.65,500 ; R1.1 C5.2@271.65,500 ; v1(301.62,500.68) 301.62,500 C5.2@271.65,500
  L04-Bottom Layer w7.5: v1(301.62,500.68) 601.68,500.68 610.24,492.13 669.29,492.13 684.35,507.18 684.35,610.24 673.23,621.36 673.23,929.13 791.34,1047.24 827.19,1047.24 845.48,1028.95 845.48,948.24 v1(826.77,929.53)
NetC12_1: C12.1 L1.1 R16.1 U3.3 U4.4 | length 778.4
  L01-Top Layer w7.5: v1(68.62,1580.74) 68.62,1578.3 72.83,1574.09 U3.3 ; U4.4@226.38,1611.22 226.38,1604.33 230.75,1599.96 258.31,1599.96 v1(270.53,1587.74) 338.58,1519.68 358.27,1519.68 397.64,1480.32 R16.1
  L01-Top Layer w15: 594.49,1472.44 598.27,1468.65 C12.1@598.27,1434.36 ; C12.1 C12.1@598.27,1434.36 ; L1.1 638.71,1434.72 598.63,1434.72 C12.1@598.27,1434.36
  L01-Top Layer w20: R16.1 480.31,1472.44 594.49,1472.44
  L04-Bottom Layer w7.5: v1(68.62,1580.74) 101.56,1613.67 145.67,1613.67 171.6,1587.74 v1(270.53,1587.74)
NetD2_1: D2.1 R4.2 | length 45.3
  L01-Top Layer w7.5: R4.2 D2.1
NetD3_1: D3.1 R7.2 | length 60.5
  L01-Top Layer w12: D3.1 76.77,468.31 76.77,503.94 86.61,513.78 R7.2
NetJ1_35: J1.35 R14.1 | length 243.5
  L01-Top Layer w7: 448.82,261.15 ccw(c480.48,261.15) 452.69,245.97 cw(c428.77,222.06) 458.31,238.54 cw(c428.77,222.06) 462.6,222.06
  L01-Top Layer w7.5: 448.82,261.15 R14.1 ; J1.35 462.6,206.94 462.6,222.06
NetJ1_46: J1.46 R15.1 | length 292.4
  L01-Top Layer w7: 409.45,273.98 ccw(c449.08,273.98) v1@421.04,245.97
  L01-Top Layer w7.5: 409.45,273.98 R15.1
  L04-Bottom Layer w7: 342.52,124.85 ccw(c366.12,124.85) 349.43,108.16 ; 342.52,188.98 cw(c399.55,188.98) 359.21,229.29 ; 370.09,240.16 cw(c384.07,226.16) 384.07,245.95
  L04-Bottom Layer w7.5: 342.52,124.85 342.52,188.98 ; 349.43,108.16 cw(c337.03,95.76) 354.57,95.76 J1.46 ; 359.22,229.3 370.08,240.16 ; 384.07,245.95 v1(421.06,245.95)
NetJ1_50: J1.50 R13.2 | length 243.9
  L01-Top Layer w7.5: v1(316.98,266.2) 317.94,267.16 317.94,301.2 R13.2
  L04-Bottom Layer w7.5: 314.96,192.91 314.96,264.19 v1(316.98,266.2) ; J1.50@315.08,60.16 315.08,192.8
  L04-Bottom Layer w8: 314.96,192.91 315.08,192.8 ; J1.50@315.08,60.16 J1.50
NetJ1_67: J1.67 R12.2 | length 303.3
  L01-Top Layer w7.5: J1.67 147.64,151.57 271.65,275.59 R12.2
NetQ1_1: Q1.1 R9.1 U3.2 | length 294.3
  L01-Top Layer w7.5: v1(92.07,1578.83) 92.52,1578.38 U3.2
  L01-Top Layer w10: R9.1@217.72,1423.23 Q1.1
  L04-Bottom Layer w7.5: v1(92.07,1578.83) 92.07,1529.98 204.38,1417.66 210.77,1417.66 v1(212.5,1415.94)
NetQ1_3: Q1.3 R10.2 R16.2 | length 223.7
  L01-Top Layer w15: Q1.3 340.55,1387.8 340.55,1467.52 R10.2 ; Q1.3@340.55,1385.83 356.3,1370.08 R16.2
NetR2_2: R2.2 U1.42 | length 834.2
  L01-Top Layer w7.5: v1(259.84,440.94) R2.2 ; v1(657.48,472.44) v1(791.34,472.44)
  L04-Bottom Layer w7.5: v1(259.84,440.94) 318.9,440.94 350.39,472.44 v1(657.48,472.44) ; v1(791.34,472.44) 791.34,519.69 826.77,555.12 v1(826.77,712.99)
NetR3_2: R3.2 U1.43 | length 998.5
  L01-Top Layer w7.5: v1(259.8,395.15) 291.81,395.15 R3.2 ; v1(653.54,440.94) 728.35,440.94 740.16,452.76 787.4,452.76 v1(803.15,437.01)
  L04-Bottom Layer w7.5: v1(259.8,395.15) 290.82,395.15 354.33,458.66 635.83,458.66 v1(653.54,440.94) ; v1(803.15,437.01) 775.59,437.01 767.72,444.88 767.72,523.62 807.09,562.99 807.09,736.61 v1(826.77,756.3)
NetR10_1: R10.1 R11.2 U4.3 | length 125.2
  L01-Top Layer w7.5: U4.3@226.38,1522.64 229.33,1519.68 263.62,1519.68 267.72,1515.58 267.72,1477.73 R11.2@262.42,1472.44
  L01-Top Layer w15: R11.2@267.51,1469.49 R10.1
NetU3_1: U3.1 U4.1 | length 78.3
  L01-Top Layer w7.5: U3.1 133.69,1543.31 137.8,1539.21 137.8,1527.72 141.9,1523.62 174.21,1523.62 U4.1@175.2,1522.64
RF_ANT: C10.2 D1.2 L1.2 P1.3 | length 142.6
  L01-Top Layer w7.5: C10.2 673.23,1435.49 L1.2 673.87,1478.38 D1.2 P1.3
RF_IN: C10.1 U1.2 | length 91
  L01-Top Layer w7.5: U1.2 C10.1
RST_GPS: R12.1 R13.1 U1.49 | length 1125.5
  L01-Top Layer w7.5: R12.1 R13.1 353.69,335.63 v1(354.97,336.91)
  L04-Bottom Layer w7.5: v1(354.97,336.91) 640.06,336.91 696.85,393.7 696.85,866.81 826.77,996.74 v1(826.77,1016.14)
RX_GPS_CONN: J1.62 R3.1 | length 454.4
  L01-Top Layer w7.5: R3.1 330.1,399.98 v1(366.37,399.98)
  L04-Bottom Layer w7.5: J1.62 197.09,224.91 334.38,362.2 342.52,362.2 353.58,373.27 353.58,386.6 366.37,399.39 v1(366.37,399.98)
SCL: J1.40 U1.45 | length 1048.6
  L04-Bottom Layer w7.5: J1.40 413.62,173.46 511.81,271.65 673.23,271.65 748.03,346.46 748.03,566.93 771.65,590.55 771.65,787.8 v1(826.77,842.91)
SDA: J1.42 U1.44 | length 1172.9
  L04-Bottom Layer w7.5: J1.42 393.94,177.4 514.68,298.15 521.34,298.15 538.15,314.96 688.98,314.96 728.35,354.33 728.35,566.93 755.91,594.49 755.91,795.28 775.59,814.96 775.59,830.71 810.98,866.1 834.52,866.1 844.87,855.76 844.87,817.7 v1(826.77,799.61)
TP1: R14.2 R15.2 U1.53 | length 1194.2
  L01-Top Layer w7.5: R15.2 R14.2 448.82,540.87 452.76,544.81 v1(452.76,547.24)
  L04-Bottom Layer w7: v1(452.76,547.24) ccw(c452.76,581.82) 477.2,557.37 ; 490.7,570.87 ccw(c449.24,612.33) 507.87,612.33 ; 507.87,1064.88 cw(c607.87,1064.88) 537.16,1135.59 ; 543.31,1141.73 cw(c562.32,1122.72) 562.32,1149.61 ; 745.59,1149.61 ccw(c745.59,1249.61) 816.3,1178.9
  L04-Bottom Layer w7.5: 477.2,557.37 490.7,570.87 ; 507.87,612.33 507.87,1064.88 ; 537.16,1135.59 543.31,1141.73 ; 562.32,1149.61 745.59,1149.61 ; 816.3,1178.9 v1(826.77,1189.37)
TP2: D2.2 U1.54 | length 1679.8
  L01-Top Layer w7.5: v1(661.42,515.75) 618.11,472.44 618.11,444.88 641.73,421.26 740.16,421.26 753.94,407.48 D2.2
  L04-Bottom Layer w7: 362.2,739.48 ccw(c389.09,739.48) 370.08,720.47 cw(c341.56,691.96) 381.89,691.96 ; 362.2,1191.96 cw(c402.53,1191.96) 374.02,1220.47 cw(c403.48,1191.01) 403.48,1232.68 ; 381.89,601.97 ccw(c475.98,601.97) 409.45,535.43 ccw(c456.97,582.96) 456.97,515.75
  L04-Bottom Layer w7.5: 362.2,739.48 362.2,1191.96 ; 381.89,601.97 381.89,691.96 ; 403.48,1232.68 v1(826.77,1232.68) ; 456.97,515.75 v1(661.42,515.75)
TX_GPS_CONN: J1.64 R2.1 | length 508.7
  L01-Top Layer w7.5: R2.1 372.34,440.94 v1(373.2,441.81)
  L04-Bottom Layer w7.5: J1.64 177.4,244.33 373.2,440.13 v1(373.2,441.81)
USB_D_N: J1.9 U1.39 | length 783.1
  L01-Top Layer w6.33: U1.39 ccw(c663.19,679.53) 639.66,656 642.98,652.69 cw(c635.49,645.19) 646.09,645.19 646.09,605.11 cw(c546.09,605.11) 616.8,534.39 558.69,476.28 ccw(c613.66,421.31) 535.91,421.31 535.91,329.94 ccw(c573.89,329.94) 547.04,303.08 547.19,302.92 ccw(c613.18,368.91) 613.18,275.59 616.2,275.59 cw(c616.2,194.94) 673.23,251.97 702.76,222.44 cw(c654.65,174.34) 722.68,174.34 722.68,83.55 722.23,83.1 722.23,53.92 J1.9
USB_D_P: J1.7 U1.40 | length 783
  L01-Top Layer w6.33: U1.40 670.51,676.81 ccw(c694.34,652.99) 660.65,652.99 cw(c649.62,652.99) 657.42,645.19 657.42,604.95 cw(c546.46,604.95) 624.92,526.49 566.73,468.31 ccw(c613.78,421.26) 547.24,421.26 547.24,330.03 ccw(c574.13,330.03) 555.12,311.02 ccw(c613.31,369.21) 613.31,286.92 616.3,286.92 cw(c616.3,195.17) 681.17,260.05 710.9,230.32 cw(c655.1,174.52) 734.01,174.52 734.01,83.55 734.46,83.1 734.46,53.92 J1.7
pads on no net: J1.1 J1.6 J1.8 J1.10 J1.20 J1.22 J1.23 J1.24 J1.25 J1.26 J1.28 J1.29 J1.30 J1.31 J1.32 J1.34 J1.36 J1.37 J1.38 J1.41 J1.43 J1.44 J1.47 J1.48 J1.49 J1.52 J1.53 J1.54 J1.55 J1.56 J1.58 J1.59 J1.60 J1.61 J1.63 J1.65 J1.66 J1.68 J1.69 U1.7 U1.8 U1.9 U1.10 U1.11 U1.13 U1.15 U1.16 U1.17 U1.18 U1.19 U1.20 U1.21 U1.22 U1.23 U1.24 U1.25 U1.26 U1.27 U1.28 U1.29 U1.30 U1.31 U1.35 U1.46 U1.50 U1.51 U1.52

## Polygon pours and split planes (outlines as drawn)
GND on L01-Top Layer "NONET_L-01_P-001" (solid, remove dead copper, pour order 7): 0,1653.54 866.14,1653.54 866.14,124.02 0,124.02
+3V3 on L04-Bottom Layer "+3V3_L04_P003" (solid, remove dead copper, pour order 3): 72.09,220.47 72.09,110.24 157.72,110.24 157.72,220.47 141.73,220.47
+3V3 on L04-Bottom Layer "NONET_L-01_P-001" (solid, remove dead copper, pour order 9): 846.46,217.72 846.46,141.73 814.96,133.86 807.09,122.05 762.43,122.05 762.43,217.72
GND on L04-Bottom Layer "NONET_L-01_P-001" (solid, remove dead copper, pour order 10): 0,1653.54 0,135.4 866.14,135.4 866.14,1653.54 753.15,1653.54
GND on L02-Inner Layer "GND_L02_P011" (solid, remove dead copper, pour order 11): 3.53,1653.54 866.14,1653.54 866.14,114.17 -3.94,114.17 -3.94,129.92
GND on L03-Inner Layer "GND_L03_P013" (solid, remove dead copper, pour order 13): 212.6,1649.61 212.6,1039.37 909.45,1039.37 909.45,1649.61
+3V3 on L03-Inner Layer "+3V3_L03_P012" (solid, remove dead copper, pour order 12): 248.03,1064.71 866.14,1064.71 866.14,114.17 0,114.17 0,1653.54 248.03,1653.54 248.03,1625.98

## Keep-outs
Keep-Out Layer:
  lines w0.5: 2379.06,-1421.42 ccw(c2379.02,-1381.3) 2419.13,-1381.3

## Other copper
L01-Top Layer:
  pour cut-out: 370.08,1492.13 370.08,1379.54 572.83,1379.54 572.83,1496.5 372.05,1496.5

## Silkscreen, mask and mechanical layers (free items; w line width, h text height)
Top Overlay:
  text "M2 ZED-F9T V1" at 251.97,196.85 h59.06
  text "B Key" at 590.55,159.17 h30
M01_PCB_Outline:
  the board outline again, w4

## Dimensions
42.32,0 to 823.82,0 on M03_PCB_Dimensions
42.32,0 to 0,1653.54 on M03_PCB_Dimensions
0,124.02 to 866.14,124.02 on M03_PCB_Dimensions

## Text inside footprints (layer, text, board x,y; h text height)
J1: Top Overlay "1" at 787.64,104.33 h19.68 r270; Top Overlay "21" at 593.5,107.27 h19.68 r270; Top Overlay "11" at 692.71,106.3 h19.68 r270; Top Overlay "75" at 55.34,110.24 h19.68 r270; Bottom Overlay "2" at 788.69,118.11 h19.68 r270; Bottom Overlay "20" at 594.49,106.3 h19.68 r270; Bottom Overlay "10" at 698.07,110.24 h19.68 r270; Bottom Overlay "74" at 66.93,114.17 h19.68 r270